# Altium PCB SW-SMD_MSK12CO2_2022-02-25.pcbdoc
Units mil, origin at the board's own origin, x right, y up, seen from the top; angles counter-clockwise.
Board outline 1335 x 1233.51 mil, 2 copper layers (Top Layer, Bottom Layer); 1 components, 0 nets, 9 pads, 0 vias.
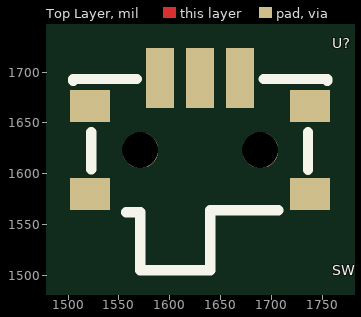
[diagram p0: Top Layer view]
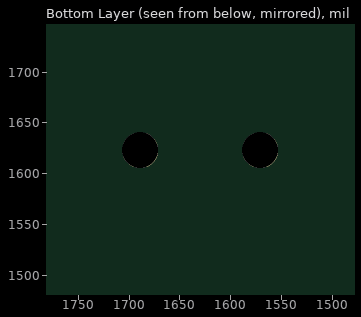
[diagram p1: Bottom Layer view, seen from below]

## Layer stack, top to bottom
Top Layer: signal copper (thickness not stored)
Dielectric: dielectric 12.6, FR-4, Dk 4.8
Bottom Layer: signal copper (thickness not stored)

## Board outline
2335,1000 1000,1000 1000,2233.51 2335,2233.51

## Components (designator, comment, footprint, x,y, rotation, side; value= is the part's Value field where it differs from the comment)
U? "SW-SMD_MSK12CO2" SW-SMD_MSK12CO2 1630,1611.75 r0 top

## Footprints (in the part's own frame and the unit in brackets; to place one, negate y for a bottom-side part, rotate by r counter-clockwise, add the part's x,y. Pads: shape width x height; smd on the part's side, far side on the other; paste and mask are expansions set on the pad)
SW-SMD_MSK12CO2 [mm]
  rect 0.7x1.5 smd: 1(-1,2.089) 2(0,2.089) 3(1,2.089)
  rect 1x0.8 smd: 4(-2.75,-0.812) 4(-2.75,1.389) 5(2.75,-0.812) 5(2.75,1.388)
  round 0.9 hole 0.9 unplated: ""(-1.5,0.288) ""(1.5,0.288)
  silkscreen extent -3.17,-2.71 3.17,2.07

## Nets (pads, with @x,y where several pads share a name; then routed paths per layer and width w, separated by ;. In a path a pad name is that pad's centre, name@x,y a point inside that pad or via, vN(x,y) a via of type N, cw(c..) or ccw(c..) an arc to the next point about the centre after c; other vN are vias at no path point)
pads on no net: U?. U?.1 U?.2 U?.3 U?.4 U?.5

## Silkscreen, mask and mechanical layers (free items; w line width, h text height)
Document:
  lines w0.1: 1667.49,1616.74 1667.51,1616.76